# Altium PCB smd-double layer.PcbDoc
Units mm, origin at the board's own origin, x right, y up, seen from the top; angles counter-clockwise.
Board outline 152.4 x 101.6 mm, 2 copper layers (Top Layer, Bottom Layer); 61 components, 107 nets, 206 pads, 0 vias.
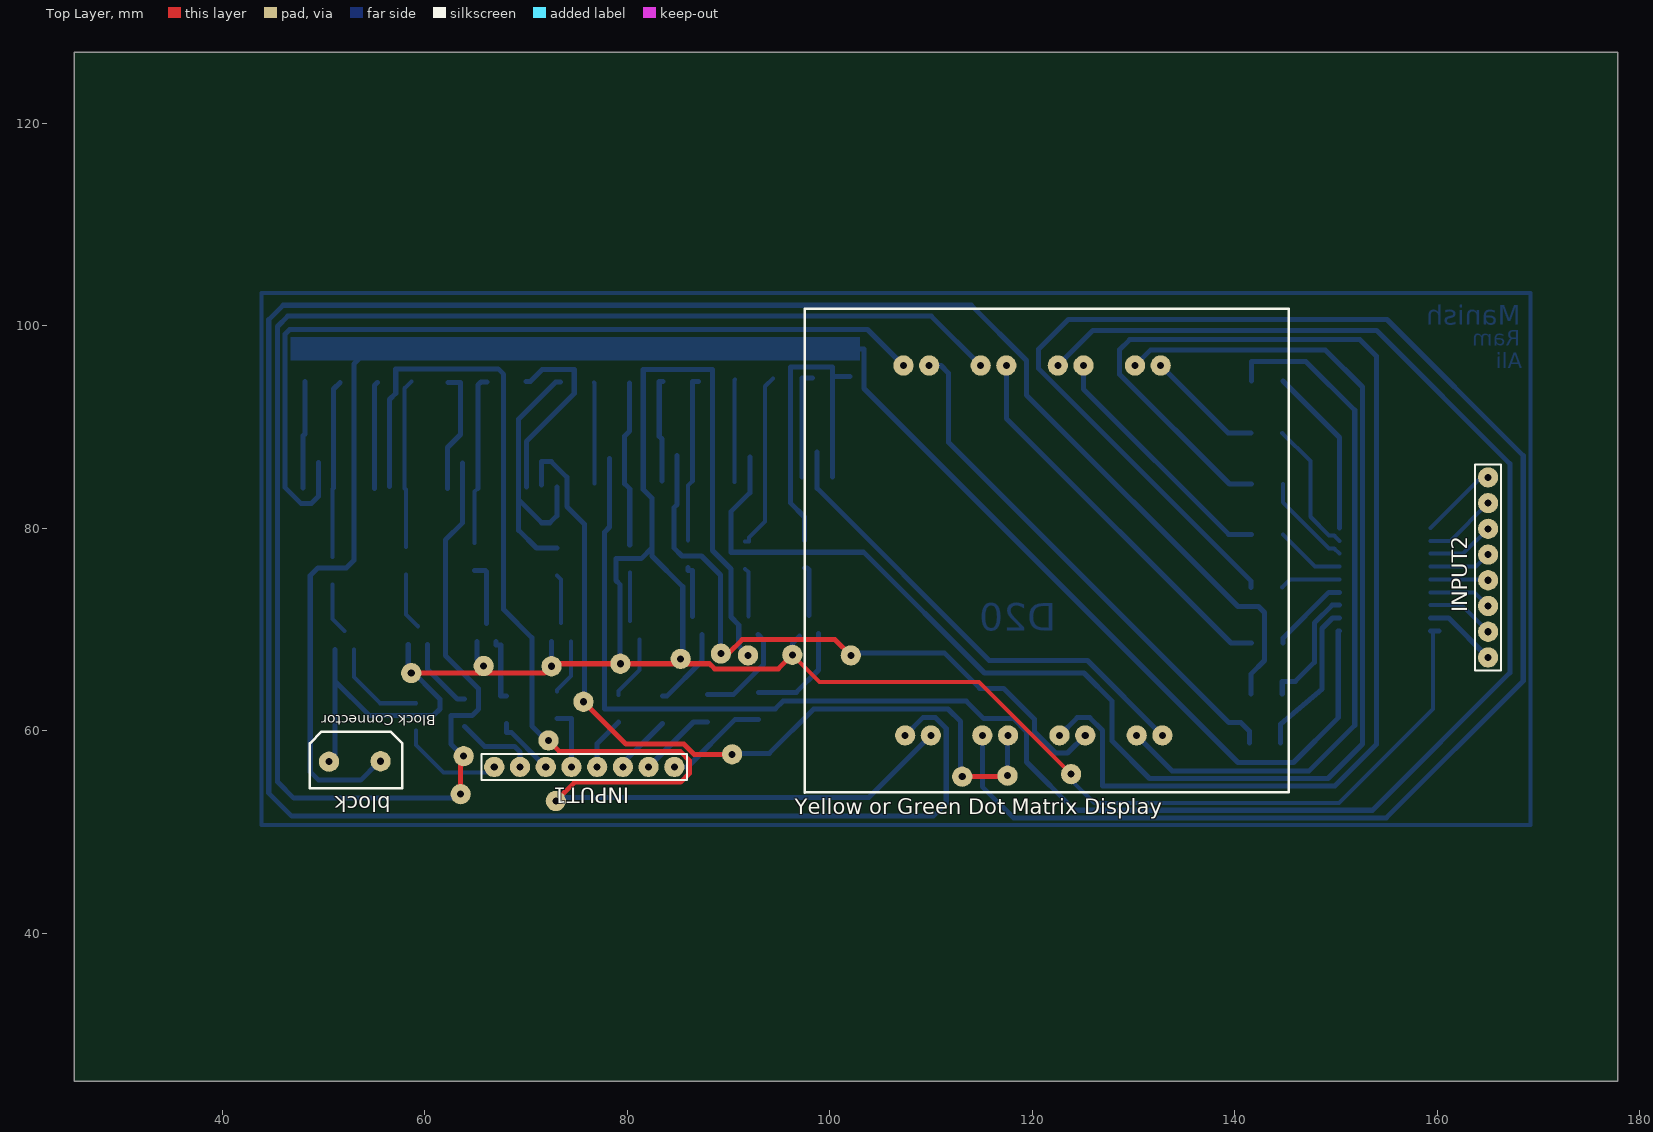
[diagram p0: Top Layer view]
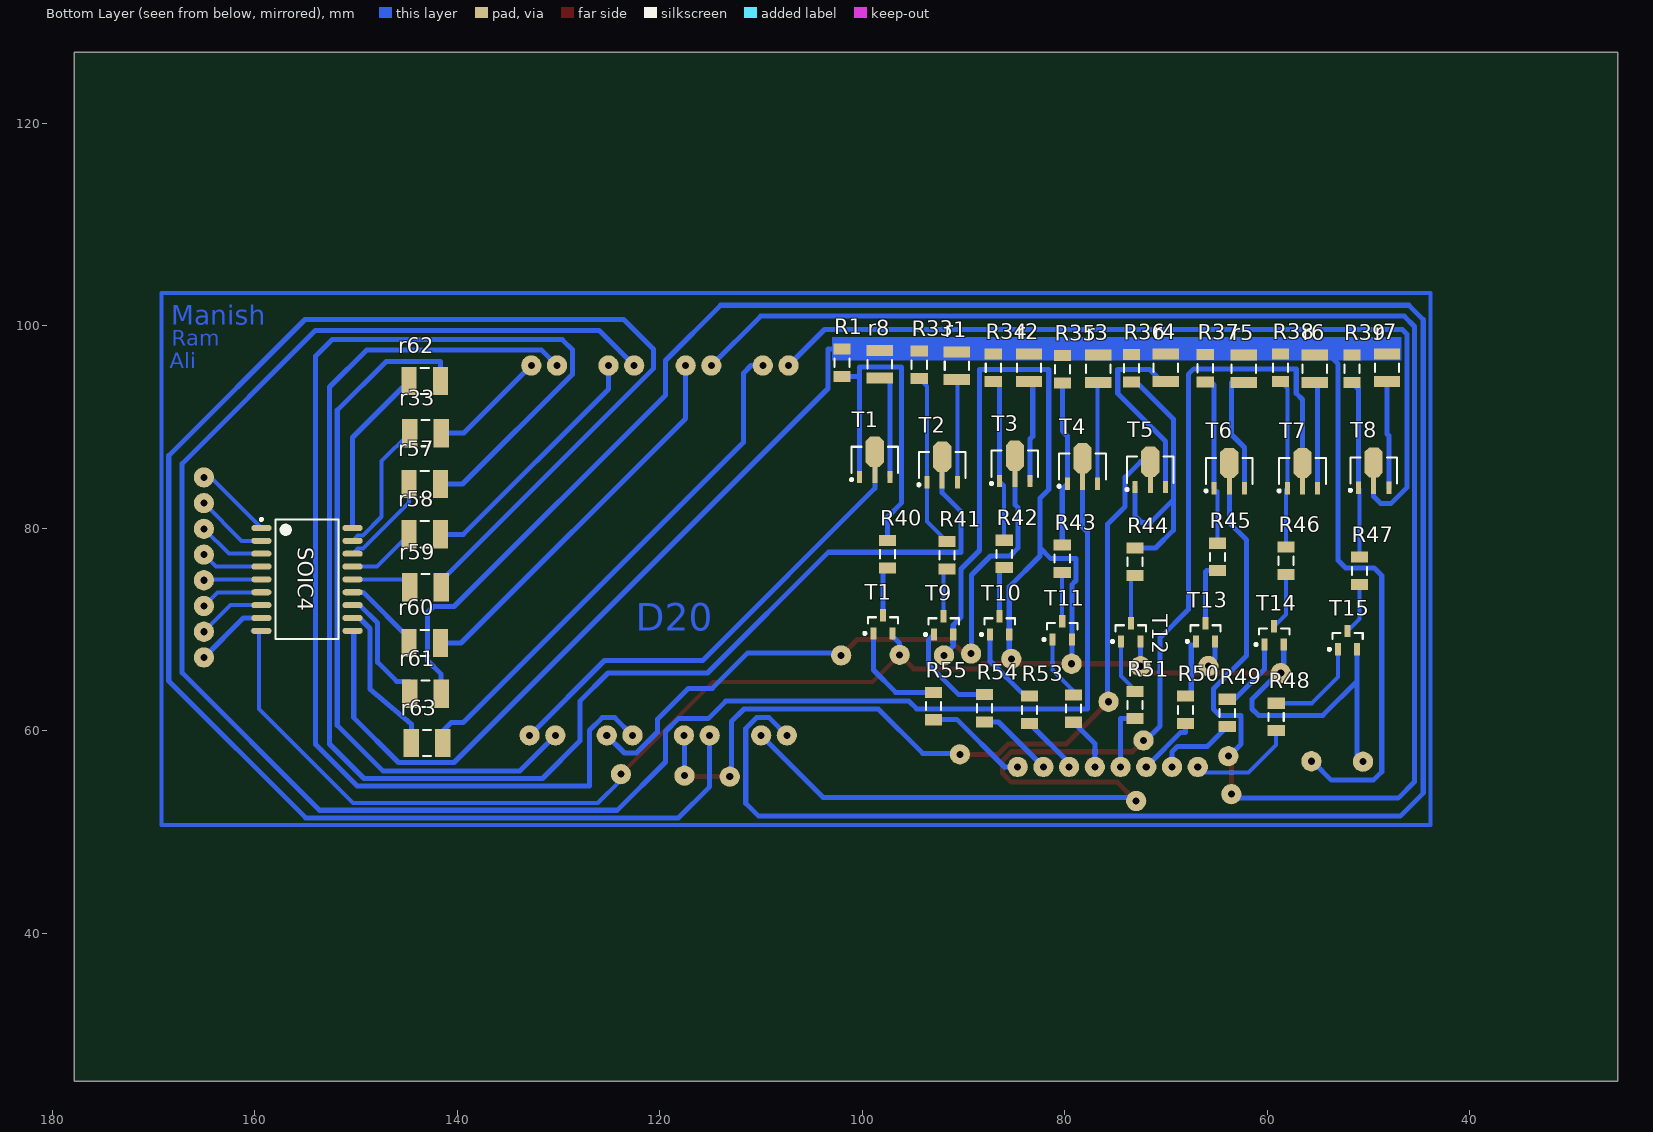
[diagram p1: Bottom Layer view, seen from below]

## Layer stack, top to bottom
Top Layer: signal copper 0.0356
Dielectric: dielectric 0.32, FR-4, Dk 4.8
Bottom Layer: signal copper 0.0356

## Board outline
25.4,25.4 177.8,25.4 177.8,127 25.4,127

## Design rules (kind name [scope] priority, off if disabled: settings)
Clearance [All] p1: gap=0.254
PolygonConnect [All] p1: connectstyle=Relief reliefconductorwidth=0.254 reliefentries=4 polygonreliefangle="90 Angle"
RoutingVias [All] p1: holewidth=0.711 width=1.27 viastyle="Through Hole" minholewidth=0.711 minwidth=1.27 maxholewidth=0.711 maxwidth=1.27
SilkscreenOverComponentPads [All] p1: minsilkscreentomaskgap=0.254
SolderMaskExpansion [All] p1: expansion=0.102
Width [All] p1: maxlimit=0.6 minlimit=0.4 preferedwidth=0.5 minimp=50.000000 maximp=50.000000 favimp=50.000000
27 further rules are at their usual default settings.

## Components (designator, comment, footprint, x,y, rotation, side; value= is the part's Value field where it differs from the comment)
block "Comment" "PCB Block Connector" 53.1,56.975 r180 top
INPUT1 "Comment" HDR1X8 66.869,56.433 r0 top
INPUT2 "Comment" HDR1X8 165,85.025 r270 top
R1 "Comment" RESC3216L 102,96.35 r90 bottom
r1 "Comment" RESC3225L 90.65,96.05 r90 bottom
r2 "Comment" RESC3225L 83.525,95.85 r90 bottom
r3 "Comment" RESC3225L 76.7,95.75 r90 bottom
r4 "Comment" RESC3225L 70.025,95.85 r90 bottom
r5 "Comment" RESC3225L 62.325,95.75 r90 bottom
r6 "Comment" RESC3225L 55.325,95.75 r90 bottom
r7 "Comment" RESC3225L 48.175,95.85 r90 bottom
r8 "Comment" RESC3225L 98.275,96.2 r90 bottom
r33 "Comment" RESC3225M 143.125,89.4 r180 bottom
R33 "Comment" RESC3216L 94.375,96.15 r90 bottom
R34 "Comment" RESC3216L 87.05,95.85 r90 bottom
R35 "Comment" RESC3216L 80.225,95.7 r90 bottom
R36 "Comment" RESC3216L 73.4,95.8 r90 bottom
R37 "Comment" RESC3216L 66.125,95.8 r90 bottom
R38 "Comment" RESC3216L 58.7,95.85 r90 bottom
R39 "Comment" RESC3216L 51.65,95.75 r90 bottom
R40 "Comment" RESC3216L 97.493,77.439 r90 bottom
R41 "Comment" RESC3216L 91.637,77.339 r90 bottom
R42 "Comment" RESC3216L 85.979,77.466 r90 bottom
R43 "Comment" RESC3216L 80.25,77 r90 bottom
R44 "Comment" RESC3216L 73.075,76.7 r90 bottom
R45 "Comment" RESC3216L 64.925,77.175 r90 bottom
R46 "Comment" RESC3216L 58.15,76.8 r90 bottom
R47 "Comment" RESC3216L 50.9,75.8 r90 bottom
R48 "Comment" RESC3216L 59.125,61.375 r270 bottom
R49 "Comment" RESC3216L 63.95,61.775 r270 bottom
R50 "Comment" RESC3216L 68.075,62.075 r270 bottom
R51 "Comment" RESC3216L 73.075,62.55 r270 bottom
R53 "Comment" RESC3216L 83.475,62.075 r270 bottom
R54 "Comment" RESC3216L 87.925,62.225 r270 bottom
R55 "Comment" RESC3216L 92.95,62.45 r270 bottom
r57 "Comment" RESC3225M 143.2,84.375 r180 bottom
r58 "Comment" RESC3225M 143.2,79.4 r180 bottom
r59 "Comment" RESC3225M 143.125,74.175 r180 bottom
r60 "Comment" RESC3225M 143.2,68.675 r180 bottom
r61 "Comment" RESC3225M 143.125,63.65 r180 bottom
r62 "Comment" RESC3225M 143.2,94.55 r180 bottom
r63 "Comment" RESC3225M 142.975,58.8 r180 bottom
SOIC4 "Comment" SOIC127P1030-18L 154.825,74.95 r180 bottom
T1 "Comment" SOT23-3L 97.943,70.515 r90 bottom
T1 "Comment" SOT89L 98.75,86.75 r90 bottom
T2 "Comment" SOT89L 92.1,86.25 r90 bottom
T3 "Comment" SOT89L 84.925,86.375 r90 bottom
T4 "Comment" SOT89L 78.25,86.1 r90 bottom
T5 "Comment" SOT89L 71.55,85.775 r90 bottom
T6 "Comment" SOT89L 63.75,85.65 r90 bottom
T7 "Comment" SOT89L 56.525,85.65 r90 bottom
T8 "Comment" SOT89L 49.5,85.7 r90 bottom
T9 "Comment" SOT23-3L 91.96,70.415 r90 bottom
T10 "Comment" SOT23-3L 86.429,70.415 r90 bottom
T11 "Comment" SOT23-3L 80.25,69.925 r90 bottom
T12 "Comment" SOT23-3L 73.475,69.725 r90 bottom
T13 "Comment" SOT23-3L 66.1,69.725 r90 bottom
T14 "Comment" SOT23-3L 59.325,69.425 r90 bottom
T15 "Comment" SOT23-3L 52.075,68.95 r90 bottom
? "Comment" "Yellow or Green Dot Matrix DIsplay" 121.327,77.811 r0 top locked
? "Comment" RESC3216L 79.125,62.2 r270 bottom

## Footprints (in the part's own frame and the unit in brackets; to place one, negate y for a bottom-side part, rotate by r counter-clockwise, add the part's x,y. Pads: shape width x height; smd on the part's side, far side on the other; paste and mask are expansions set on the pad)
HDR1X8 [mm]
  round 2 hole 0.7: 1(0,0) 2(2.54,0) 3(5.08,0) 4(7.62,0) 5(10.16,0) 6(12.7,0) 7(15.24,0) 8(17.78,0)
  silkscreen extent -1.27,-1.27 19.05,1.27
"PCB Block Connector" [mm]
  round 2 hole 0.7: 1(-2.547,-0.023) 2(2.547,0.023)
  silkscreen extent -4.7,-2.94 4.45,2.65
RESC3216L [mm] "Chip Resistor, Body 3.2x1.6mm, IPC High Density"
  rect 1.1x1.7 smd: 1(-1.35,0) 2(1.35,0)
  silkscreen extent -0.4,-0.75 0.4,0.75, body extent -1.68,-0.87 1.68,0.87, height 0.71
RESC3225L [mm] "Chip Resistor, Body 3.2x2.5mm, IPC High Density"
  rect 1.1x2.6 smd: 1(-1.35,0) 2(1.35,0)
  silkscreen extent -0.4,-1.2 0.4,1.2, body extent -1.68,-1.32 1.68,1.32, height 0.71
RESC3225M [mm] "Chip Resistor, Body 3.2x2.5mm, IPC Low Density"
  rect 1.5x2.8 smd: 1(-1.55,0) 2(1.55,0)
  silkscreen extent -0.4,-1.3 0.4,1.3, body extent -1.68,-1.32 1.68,1.32, height 0.71
SOIC127P1030-18L [mm] "SOIC, 18-Leads, Body 11.6x7.5mm, Pitch 1.27mm, IPC High Density"
  oval 2x0.6 smd: 1(-4.5,5.08) 2(-4.5,3.81) 3(-4.5,2.54) 4(-4.5,1.27) 5(-4.5,0) 6(-4.5,-1.27) 7(-4.5,-2.54) 8(-4.5,-3.81) 9(-4.5,-5.08) 10(4.5,-5.08) 11(4.5,-3.81) 12(4.5,-2.54) 13(4.5,-1.27) 14(4.5,0) 15(4.5,1.27) 16(4.5,2.54) 17(4.5,3.81) 18(4.5,5.08)
  silkscreen extent -4.62,-5.9 3.1,6.05, body extent -3.8,-5.95 3.8,5.95, height 2.65
SOT23-3L [mm] "SOT23, 3-Leads, Body 2.9x1.3mm, Pitch 0.95mm, Lead Span 2.5mm, IPC High Density"
  rect 1.2x0.6 smd: 1(-0.9,0.95) 2(-0.9,-0.95) 3(0.9,0)
  silkscreen extent -1.02,-1.5 0.7,1.93, body extent -0.7,-1.5 0.7,1.5, height 1.1
SOT89L [mm] "SOT89, 3-Leads, Body 4.5x2.4 mm, Pitch 1.5mm, Lead Span 4.1mm, IPC High Density"
  rect 1.2x0.5 smd: 1(-1.7,1.5) 3(-1.7,-1.5)
  rect 1.6x0.5 smd: 2(-1.5,0)
  oct 3x1.8 smd: 2(0.8,0)
  silkscreen extent -2.07,-2.3 1.3,2.43, body extent -1.3,-2.3 1.3,2.3, height 1.6
"Yellow or Green Dot Matrix DIsplay" [mm] "Y or G Dot Matrix"
  round 2 hole 0.7: 3(-13.886,-18.262) 4(-11.346,-18.262) 6(-6.266,-18.262) 7(-3.726,-18.262) 9(1.354,-18.262) 10(3.894,-18.262) 12(8.974,-18.262) 13(11.514,-18.262) 20(11.346,18.262) 21(8.806,18.262) 23(3.726,18.262) 24(1.186,18.262) 26(-3.894,18.262) 27(-6.434,18.262) 29(-11.514,18.262) 30(-14.054,18.262)
  silkscreen extent -23.78,-23.9 23.99,23.89

## Free pads (board coordinates)
  round 2 hole 0.7: 0(113.075,55.475) 1(117.55,55.575) 2(89.25,67.625) 3(102.075,67.45) 4(65.825,66.4) 5(72.525,66.375) 6(79.325,66.625) 7(85.275,67.1) 8(91.925,67.45) 9(96.3,67.5) 10(123.825,55.725) 11(63.85,57.5) 12(63.55,53.75) 13(72.225,59.05) 14(75.675,62.875) 15(72.95,53.075) 16(90.35,57.675) 17(58.675,65.7)

## Nets (pads, with @x,y where several pads share a name; then routed paths per layer and width w, separated by ;. In a path a pad name is that pad's centre, name@x,y a point inside that pad or via, vN(x,y) a via of type N, cw(c..) or ccw(c..) an arc to the next point about the centre after c; other vN are vias at no path point)
A1: r63.1 SOIC4.11 | length 15.4
  Bottom Layer w0.5: r63.1 144.525,60.674 148.607,64.12 148.607,70.115 149.632,71.14 SOIC4.11
A2: r61.1 SOIC4.12 | length 12.3
  Bottom Layer w0.5: r61.1 144.675,64.882 145.959,64.882 147.845,66.768 147.845,70.648 149.606,72.41 SOIC4.12
A3: r60.1 SOIC4.13 | length 7.9
  Bottom Layer w0.5: r60.1 144.75,69.154 149.276,73.68 SOIC4.13
A4: r59.1 SOIC4.14 | length 6
  Bottom Layer w0.4: r59.1 145.45,74.95 SOIC4.14
A5: r58.1 SOIC4.15 | length 6.9
  Bottom Layer w0.4: r58.1 147.93,76.22 SOIC4.15
A6: r57.1 SOIC4.16 | length 9.5
  Bottom Layer w0.4: r57.1 144.75,82.569 149.313,78.006 149.809,78.006 SOIC4.16
A7: r33.1 SOIC4.17 | length 13.3
  Bottom Layer w0.4: r33.1 147.45,86.625 147.45,81.139 149.313,79.276 149.809,79.276 SOIC4.17
A8: r62.1 SOIC4.18 | length 16.8
  Bottom Layer w0.5: r62.1 150.325,88.975 SOIC4.18
A9: 
A10: 
A11: 
A12: 
A13: 
A14: 
A15: 
A16: 
A17: 
A18: 
A19: 
A20: 
A21: 
A22: 
A23: 
A24: 
b1: R39.1 R47.2 T8.1 | length 17.6
  Bottom Layer w0.4: R47.2 50.9,83.9 T8.1
  Bottom Layer w0.5: T8.1 51,93.75 R39.1
b2: R38.1 R46.2 T7.1 | length 16.7
  Bottom Layer w0.4: R46.2 58.15,83.825 T7.1 58.025,93.825 R38.1
b3: R37.1 R45.2 T6.1 | length 16.8
  Bottom Layer w0.4: R45.2 64.925,83.625 T6.1
  Bottom Layer w0.5: T6.1 65.25,94.151 65.549,94.45 R37.1
b4: R36.1 R44.2 T5.1 | length 29
  Bottom Layer w0.5: T5.1 73.05,81.24 72.358,80.548 71.56,80.548 69.282,82.825 ; R44.2 71.035,78.05 69.282,79.803 69.282,82.825 ; R36.1 72.94,94.45 69.282,90.792 69.282,82.825
b5: R35.1 R43.2 T4.1 | length 16.4
  Bottom Layer w0.5: R35.1 80.225,89.589 79.75,89.114 T4.1 80.25,83.9 R43.2
b6: R34.1 R42.2 T3.1 | length 16.5
  Bottom Layer w0.4: R42.2 85.979,84.229 T3.1
  Bottom Layer w0.5: T3.1 86.425,94.5 R34.1
b7: R33.1 R41.2 T2.1 | length 17.5
  Bottom Layer w0.4: R41.2 92.041,78.689 92.041,79.093 93.6,80.652 T2.1 93.6,94.025 R33.1
b8: R1.1 R40.2 T1.1@100.25,85.05 | length 34.5
  Bottom Layer w0.5: R40.2 97.493,81.122 96.105,82.51 96.105,95.921 100.25,95.921 100.25,95 ; T1.1@100.25,85.05 100.25,95 ; R1.1 100.25,95
c1: ?.30 T8.2 | length 85.4
  Bottom Layer w0.5: T8.2@49.5,86.5 49.5,84.2 49.5,83.145 48.814,82.459 47.769,82.459 46.219,84.009 46.219,99.18 46.668,99.63 103.717,99.63 ?.30
c2: ?.4 pad.13 pad.15 T7.2 | length 130.2
  Top Layer w0.5: pad.13 73.338,57.937 85.272,57.937 86.153,57.056 86.153,55.81 85.272,54.929 74.804,54.929 pad.15
  Bottom Layer w0.5: T7.2@56.525,84.15 56.525,86.45 56.525,92.714 57.141,93.33 57.141,95.743 67.25,95.743 67.793,95.201 67.793,71.985 70.578,69.2 70.578,60.472 pad.13@71.675,59.375 ; pad.15@72.85,53.427 103.859,53.427 ?.4
c3: ?.27 pad.11 pad.12 T6.2 | length 173.1
  Top Layer w0.5: pad.12 pad.11@63.55,57.2
  Bottom Layer w0.5: pad.11@63.584,57.687 62.577,58.694 62.577,61.504 64.685,61.504 65.32,62.139 65.32,64.168 62.063,67.425 62.063,78.855 63.75,80.542 63.75,84.15 T6.2@63.75,86.45 ; pad.12@63.675,54.1 62.925,53.35 47.075,53.35 45.457,54.968 45.457,99.934 46.465,100.942 110.024,100.942 ?.27
c4: ?.7 pad.0 pad.1 pad.14 pad.16 T5.2 | length 84.3
  Top Layer w0.5: pad.14 79.859,58.691 85.584,58.691 86.6,57.675 pad.16 ; pad.0 pad.1@117.45,55.475
  Bottom Layer w0.5: T5.2@71.55,84.275 71.55,86.575 72.507,86.575 74.032,85.05 74.032,82.154 75.759,80.427 pad.14@75.759,62.7 ; pad.16@90.125,57.775 94.027,57.775 98.416,62.165 111.675,62.165 112.92,60.92 112.92,59.371 112.9,59.39 pad.0@112.9,55.475 ; pad.1 117.55,59.498 ?.7
c5: ?.24 T4.2 | length 198.6
  Bottom Layer w0.5: T4.2@78.25,86.9 78.25,84.6 78.25,80.122 77.766,79.638 77.766,62.175 94.617,62.175 95.368,62.927 113.479,62.927 115.206,61.199 118.152,61.199 119.425,59.926 119.425,56.929 124.196,52.158 153.583,52.158 167.15,65.725 167.15,86.375 153.975,99.55 125.99,99.55 ?.24
c6: ?.10 pad.2 pad.3 T3.2 | length 65.9
  Top Layer w0.5: pad.2 89.973,67.625 91.352,69.004 100.521,69.004 pad.3
  Bottom Layer w0.5: T3.2@84.925,87.175 84.925,84.875 84.925,82.354 84.599,82.027 84.599,78.065 85.411,77.252 87.342,77.252 89.2,75.394 pad.2@89.2,67.651 ; pad.3@101.65,67.7 111.3,67.7 114.8,64.2 117.15,64.2 120.209,61.141 120.209,59.893 122.303,57.8 123.472,57.8 ?.10
c7: ?.21 T2.2 | length 145.3
  Bottom Layer w0.5: T2.2@92.1,87.05 92.1,84.75 92.1,83.509 90.263,81.672 90.263,77.633 103.342,77.633 115.275,65.7 125.107,65.7 127.88,62.927 127.88,58.99 131.57,55.299 149.192,55.299 152.594,58.702 152.594,93.94 148.942,97.592 131.652,97.592 ?.21
c8: ?.13 T1.2@98.75,85.25 T1.2@98.75,87.55 | length 47.8
  Bottom Layer w0.5: T1.2@98.75,87.55 98.75,85.25 98.75,83.946 115.746,66.95 125.44,66.95 ?.13
COM: block.1 r1.2 R1.2 r2.2 r3.2 r4.2 r5.2 r6.2 r7.2 r8.2 R33.2 R34.2 R35.2 R36.2 R37.2 R38.2 R39.2 SOIC4.10 | length 131.9
  Bottom Layer w0.5: block.1@55.325,56.775 53.675,55.125 49.525,55.125 48.7,55.95 48.7,75.339 49.445,76.084 52.264,76.084 53.026,76.846 53.026,96.236 53.89,97.1 r6.2 ; R1.2 103.369,97.7 103.369,93.813 140.301,56.881 145.787,56.881 150.207,61.301 150.207,69.87 SOIC4.10
e1: r7.1 T8.3 | length 10.6
  Bottom Layer w0.5: T8.3 48,89.139 48.175,89.314 r7.1
e2: r6.1 T7.3 | length 10.6
  Bottom Layer w0.5: T7.3 55.025,94.1 r6.1
e3: r5.1 T6.3 | length 12.2
  Bottom Layer w0.5: T6.3 62.25,87.971 63.542,89.263 63.542,94.4 r5.1
e4: r4.1 T5.3 | length 18.8
  Bottom Layer w0.5: r4.1 70.425,94.5 71.593,95.667 74.769,95.667 74.769,93.299 70.05,88.581 T5.3
e5: r3.1 T4.3 | length 10
  Bottom Layer w0.4: r3.1 76.75,94.35 T4.3
e6: r2.1 T3.3 | length 10.3
  Bottom Layer w0.5: T3.3 83.425,88.814 83.16,89.079 83.16,94.5 r2.1
e7: r1.1 T2.3 | length 10.2
  Bottom Layer w0.4: T2.3 90.6,94.65 r1.1
e8: r8.1 T1.3@97.25,85.05 | length 10.8
  Bottom Layer w0.5: T1.3@97.25,85.05 97.25,94.85 r8.1
GND: block.2 pad.4 pad.5 pad.6 pad.7 pad.8 pad.9 pad.10 pad.17 SOIC4.9 T1.2@96.993,69.615 T9.2 T10.2 T11.2 T12.2 T13.2 T14.2 T15.2 | length 239.7
  Top Layer w0.4: pad.9 98.975,64.825 114.725,64.825 pad.10
  Top Layer w0.5: pad.17 71.85,65.7 pad.5 72.775,66.625 pad.6 88.123,66.625 88.627,66.121 94.921,66.121 pad.9
  Bottom Layer w0.4: pad.10 123.825,55.15 126.113,52.862 150.262,52.862 159.575,62.175 SOIC4.9@159.575,69.87
  Bottom Layer w0.5: block.2@51.125,57.175 51.125,64.93 ; T15.2 51.125,64.93 ; T14.2 58.375,66.265 61.51,63.13 61.51,62.165 60.875,61.53 54.525,61.53 51.125,64.93 ; T13.2 65.15,67.075 pad.4 ; pad.5 T12.2 ; pad.6@79.3,66.65 T11.2 79.3,74.433 78.884,74.849 78.884,76.998 81.373,76.998 82.44,78.065 ; pad.7@85.479,67.304 T10.2 85.479,74.23 82.44,77.269 82.44,78.065 ; pad.8 91.01,68.365 T9.2 91.01,70.46 90.237,71.232 90.237,75.982 88.409,77.811 88.409,95.667 81.579,95.667 81.579,83.828 82.44,82.967 82.44,78.065 ; pad.9 96.3,68.625 T1.2@97.013,69.337 ; SOIC4.9 159.575,69.87 SOIC4.9@160.138,69.87
I1: INPUT1.1 R48.2 | length 10.5
  Bottom Layer w0.4: R48.2 59.125,58.6 61.85,55.875 66.311,55.875 INPUT1.1
I2: INPUT1.2 R49.2 | length 8
  Bottom Layer w0.5: R49.2 65.906,58.469 68.871,58.469 69.409,57.931 INPUT1.2
I3: INPUT1.3 R50.2 | length 6.2
  Bottom Layer w0.5: R50.2 68.063,60.725 68.063,59.853 68.553,59.853 70.171,58.235 70.171,58.211 INPUT1.3
I4: INPUT1.4 R51.2 | length 6.2
  Bottom Layer w0.5: R51.2 74.489,61.2 INPUT1.4
I5: ?.2 INPUT1.5 | length 5.3
  Bottom Layer w0.5: INPUT1.5 77.029,58.754 ?.2
I6: INPUT1.6 R53.2 | length 5.9
  Bottom Layer w0.5: INPUT1.6 79.569,56.819 R53.2
I7: INPUT1.7 R54.2 | length 7.7
  Bottom Layer w0.5: INPUT1.7 86.551,60.875 R54.2
I8: INPUT1.8 R55.2 | length 10.2
  Bottom Layer w0.5: INPUT1.8 85.951,56.433 90.618,61.1 R55.2
I9: INPUT2.1 SOIC4.1 | length 7.7
  Bottom Layer w0.4: SOIC4.1 164.32,85.025 INPUT2.1
I10: INPUT2.2 SOIC4.2 | length 7.2
  Bottom Layer w0.4: SOIC4.2 161.275,78.76 INPUT2.2
I11: INPUT2.3 SOIC4.3 | length 6.7
  Bottom Layer w0.4: SOIC4.3 162.545,77.49 INPUT2.3
I12: INPUT2.4 SOIC4.4 | length 6.2
  Bottom Layer w0.4: SOIC4.4 163.815,76.22 INPUT2.4
I13: INPUT2.5 SOIC4.5 | length 5.7
  Bottom Layer w0.4: SOIC4.5 164.915,74.95 INPUT2.5
I14: INPUT2.6 SOIC4.6 | length 6.2
  Bottom Layer w0.4: SOIC4.6 163.645,73.68 INPUT2.6
I15: INPUT2.7 SOIC4.7 | length 6.8
  Bottom Layer w0.4: SOIC4.7 162.375,72.41 INPUT2.7
I16: INPUT2.8 SOIC4.8 | length 7.3
  Bottom Layer w0.5: SOIC4.8 161.105,71.14 INPUT2.8
I17: 
I18: 
I19: 
I20: 
I21: 
I22: 
I23: 
I24: 
I25: 
I26: 
I27: 
I28: 
I29: 
I30: 
I31: 
I32: 
NewNet: 
r1: R48.1 T15.1 | length 9.9
  Bottom Layer w0.4: T15.1 53.025,65.3 55.6,62.725 R48.1
r2: R49.1 T14.1 | length 7.3
  Bottom Layer w0.5: T14.1 60.275,66.091 63.241,63.125 R49.1
r3: R50.1 T13.1 | length 6.4
  Bottom Layer w0.5: T13.1 67.05,68.475 67.512,68.475 67.512,63.425 R50.1
r4: R51.1 T12.1 | length 5.5
  Bottom Layer w0.4: R51.1 73.075,64.05 74.425,65.4 T12.1
r5: ?.1 T11.1 | length 6.3
  Bottom Layer w0.4: ?.1 79.125,63.925 81.2,66 T11.1
r6: R53.1 T10.1 | length 8
  Bottom Layer w0.5: R53.1 83.9,63.425 87.379,66.904 T10.1
r7: R54.1 T9.1 | length 10
  Bottom Layer w0.5: R54.1 90.475,63.575 93.475,66.575 93.475,68.95 T9.1
r8: R55.1 T1.1@98.893,69.615 | length 10.5
  Bottom Layer w0.5: R55.1 96.693,63.8 98.893,66 T1.1@98.893,69.615
r9: R47.1 T15.3 | length 5.1
  Bottom Layer w0.4: R47.1 50.9,71.025 T15.3
r10: R46.1 T14.3 | length 5.6
  Bottom Layer w0.4: R46.1 58.15,71.5 T14.3
r11: R45.1 T13.3 | length 6.3
  Bottom Layer w0.5: R45.1 65.988,75.825 66.1,75.713 T13.3
r12: R44.1 T12.3 | length 4.9
  Bottom Layer w0.4: R44.1 73.475,74.95 T12.3
r13: R43.1 T11.3 | length 4.8
  Bottom Layer w0.4: T11.3 R43.1
r14: R42.1 T10.3 | length 5.3
  Bottom Layer w0.5: R42.1 85.979,75.816 86.429,75.816 T10.3
r15: R41.1 T9.3 | length 4.8
  Bottom Layer w0.4: R41.1 91.96,75.666 T9.3
r16: R40.1 T1.3@97.943,71.415 | length 5
  Bottom Layer w0.5: R40.1 97.76,76.089 97.943,75.906 T1.3@97.943,71.415
r17: ?.12 r62.2 | length 70
  Bottom Layer w0.5: ?.12 133.796,56.053 147.338,56.053 151.832,60.548 151.832,91.654 147.032,96.455 141.65,96.455 r62.2
r18: ?.20 r33.2 | length 11.7
  Bottom Layer w0.5: ?.20 139.346,89.4 r33.2
r19: ?.9 r57.2 | length 124.5
  Bottom Layer w0.5: ?.9 124.432,61.3 125.671,61.3 126.925,60.046 126.925,54.545 149.87,54.545 153.993,58.668 153.993,96.996 152.364,98.625 129.611,98.625 128.617,97.631 128.617,95.21 139.463,84.364 141.65,84.364 r57.2
r20: ?.23 r58.2 | length 24.9
  Bottom Layer w0.5: ?.23 125.053,93.736 139.389,79.4 r58.2
r21: ?.6 r59.2 | length 174.4
  Bottom Layer w0.5: ?.6 115.061,54.489 118.146,51.404 154.954,51.404 168.475,64.925 168.475,87.175 155.025,100.625 123.55,100.625 120.625,97.7 120.625,95.764 141.575,74.814 r59.2
r22: ?.26 r60.2 | length 38.6
  Bottom Layer w0.5: ?.26 117.433,90.849 139.615,68.667 141.65,68.667 r60.2
r23: ?.3 r61.2 | length 249.8
  Bottom Layer w0.5: ?.3 109.192,61.3 110.431,61.3 111.5,60.231 111.5,52.846 110.225,51.571 46.879,51.571 44.604,53.846 44.604,100.604 46.025,102.025 113.975,102.025 119.425,96.575 119.425,93.147 140.301,72.271 142.336,72.271 142.917,71.69 142.917,66.94 141.575,65.598 r61.2
r24: ?.29 r63.2 | length 51.7
  Bottom Layer w0.5: ?.29 110.972,96.073 111.726,95.319 111.726,88.497 139.399,60.824 140.581,60.824 141.425,59.98 r63.2
copper on no net: | length 355.7
  Bottom Layer w0.4: 43.9,103.25 43.9,50.7 169.2,50.7 169.2,103.25 43.925,103.25

## Other copper
Bottom Layer:
  rectangle net COM: 46.725,96.55 103,98.9
  text "Manish" at 168.225,100.1 h1.92
  text "Ram" at 168.175,98 h1.52
  text "Ali" at 168.35,95.8 h1.52
  text "D20" at 122.35,69.875 h2.7

## Text inside footprints (layer, text, board x,y; h text height)
block: Top Overlay "Block Connector" at 61.101,61.547 h1.02 r180
?: Top Overlay "Yellow or Green Dot Matrix Display" at 96.562,51.776 h1.52